# Altium PCB WMR_V3_PCB.PcbDoc
Units mm, origin at the board's own origin, x right, y up, seen from the top; angles counter-clockwise.
Board outline 170 x 170 mm, 2 copper layers (Top Layer, Bottom Layer); 22 components, 33 nets, 167 pads, 10 vias.
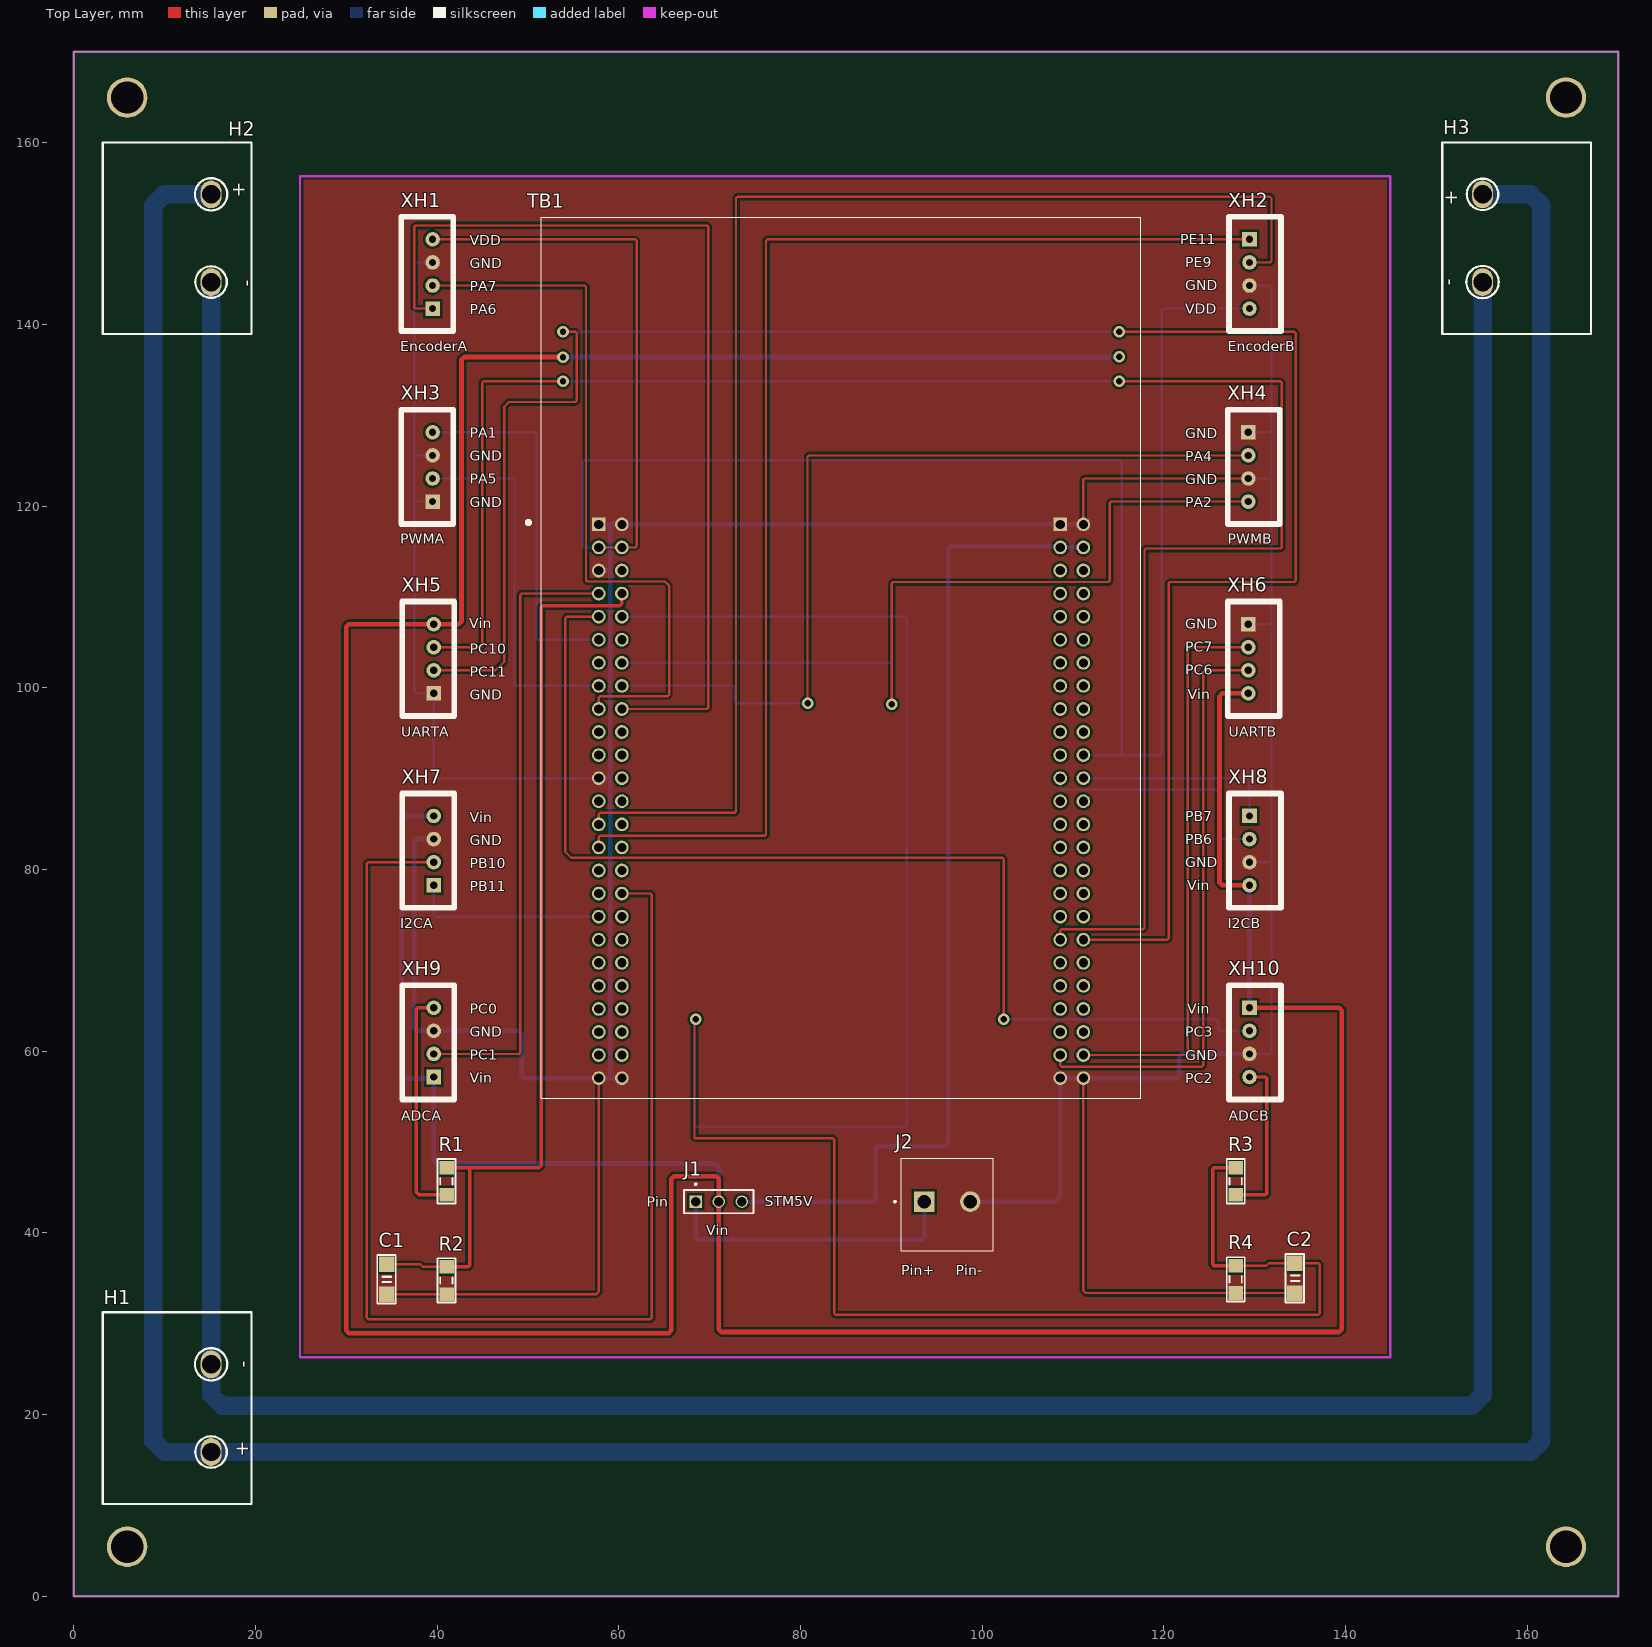
[diagram p0: Top Layer view]
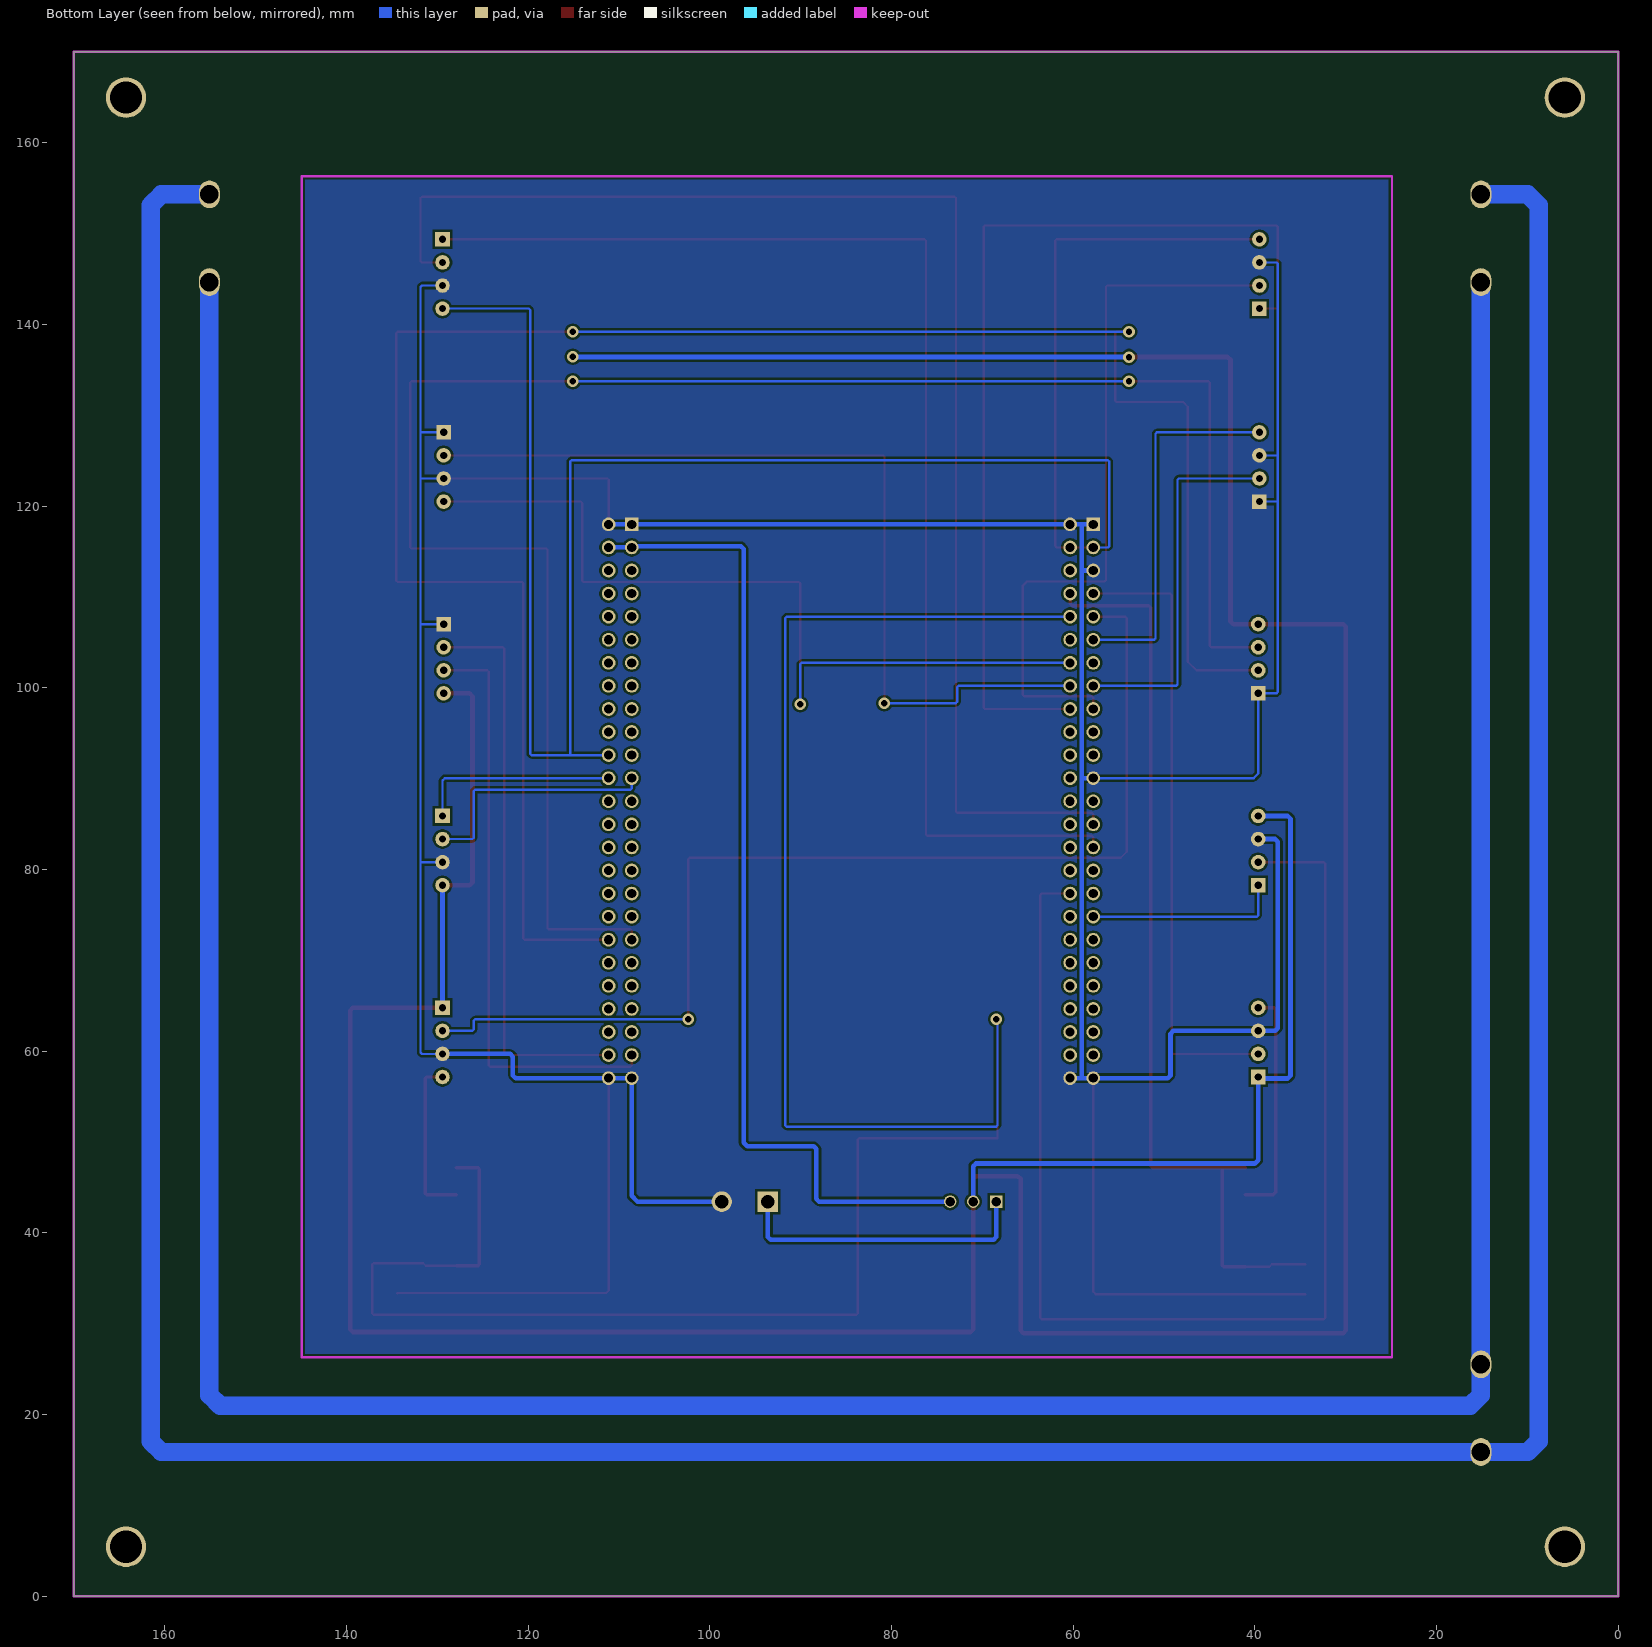
[diagram p1: Bottom Layer view, seen from below]
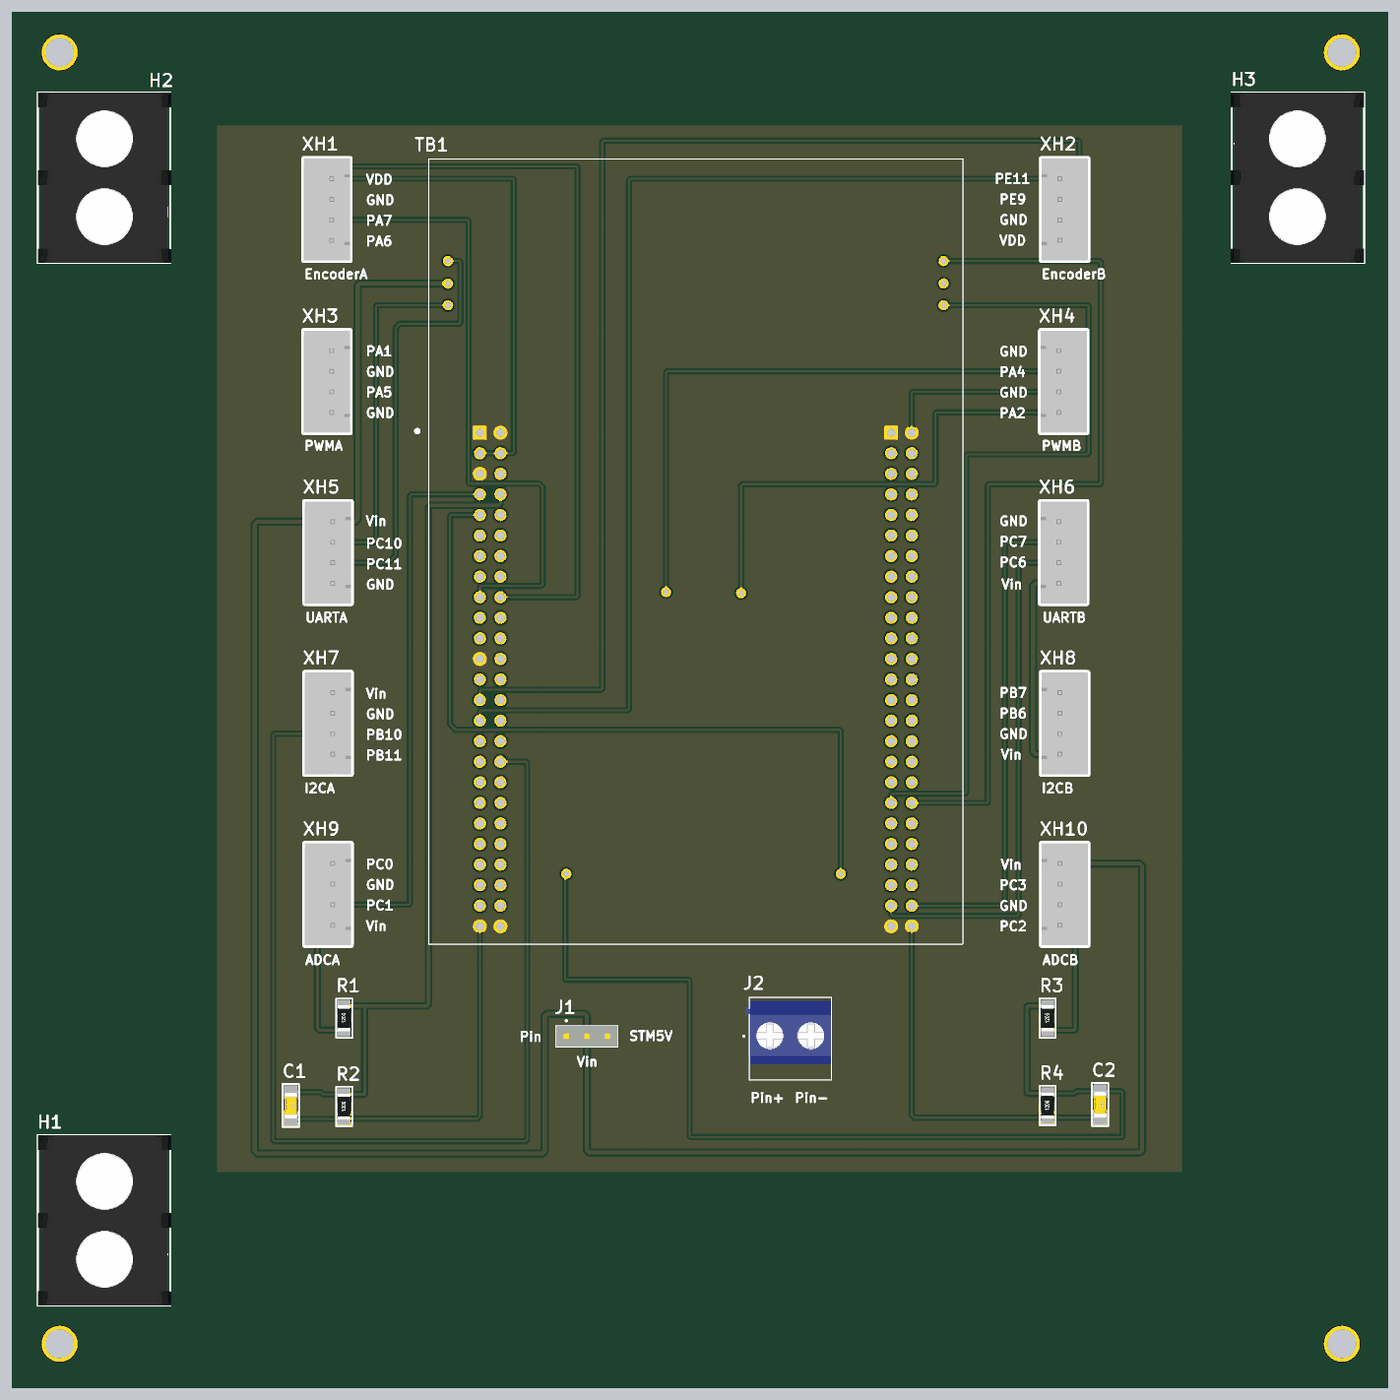
[diagram p2: 3D render of the assembled board from above, using the file's embedded part models]

## Layer stack, top to bottom
Top Solder: solder mask 0.0102, Solder Resist, Dk 3.5
Top Layer: signal copper 0.0356
Dielectric 1: dielectric 0.32, FR-4, Dk 4.8
Bottom Layer: signal copper 0.0356
Bottom Solder: solder mask 0.0102, Solder Resist, Dk 3.5

## Board outline
0,0 0,170 170,170 170,0

## Design rules (kind name [scope] priority, off if disabled: settings)
Clearance [All] p1: gap=0.254 ignorepadtopadclearanceinfootprint=FALSE except(0: Arc-Hole Track-Hole SMDPad-Hole THPad-Hole Via-Hole Fill-Hole Poly-Hole Region-Hole Text-Hole)
PolygonConnect [All] p1: connectstyle=Direct reliefconductorwidth=0.254 reliefentries=4 polygonreliefangle="90 Angle" airgapwidth=0.254
RoutingVias [All] p1: holewidth=0.711 width=1.27 viastyle="Through Hole" minholewidth=0.711 minwidth=1.27 maxholewidth=0.711 maxwidth=1.27
SolderMaskExpansion [All] p1: expansion=0.102 istentingtop=FALSE
Width [All] p1: maxlimit=2.032 minlimit=0.254 preferedwidth=0.508
30 further rules are at their usual default settings.

## Classes and differential pairs
component class WMR_V3_Sheet: R3 R4 XH1 XH2 XH3 XH4 XH5 XH6 XH7 XH8 XH9 XH10

## Components (designator, comment, footprint, x,y, rotation, side; value= is the part's Value field where it differs from the comment)
C1 "100nF" "Cap 1206" 34.425,34.879 r270 top
C2 "100nF" "Cap 1206" 134.385,35.006 r270 top
H1 "24V Vin" barrier_terminal 15.113,20.701 r90 top
H2 "H-Bridge 1" barrier_terminal 15.113,149.479 r90 top
H3 "H-Bridge 2" barrier_terminal 155.067,149.479 r270 top
J1 "" SAMTEC_TSW-101-07-G-T-LL 68.453,43.434 r270 top
J2 "" MULTICOMP_MC000048 96.139,43.434 r0 top
R1 "470" "tro smd 1206" 41.029,45.675 r90 top
R2 "1k" "tro smd 1206" 41.029,34.753 r90 top
R3 "470" "tro smd 1206" 127.908,45.674 r90 top
R4 "1k" "tro smd 1206" 127.908,34.879 r90 top
TB1 "STM32F4DISCOVERY" MODULE_STM32F4DISCOVERY 84.455,103.303 r0 top
XH1 "EncoderA" XH2.54M-4 39.497,141.732 r90 top
XH2 "EncoderB" XH2.54M-4 129.413,149.352 r270 top
XH3 "PWMA" XH2.54M-4 39.497,120.491 r90 top
XH4 "PWMB" XH2.54M-4 129.286,128.111 r270 top
XH5 "UART1" XH2.54M-4 39.624,99.377 r90 top
XH6 "UART2" XH2.54M-4 129.286,106.998 r270 top
XH7 "I2C1" XH2.54M-4 39.624,78.264 r90 top
XH8 "I2C2" XH2.54M-4 129.413,85.884 r270 top
XH9 "ADC1" XH2.54M-4 39.624,57.15 r90 top
XH10 "ADC2" XH2.54M-4 129.413,64.77 r270 top

## Footprints (in the part's own frame and the unit in brackets; to place one, negate y for a bottom-side part, rotate by r counter-clockwise, add the part's x,y. Pads: shape width x height; smd on the part's side, far side on the other; paste and mask are expansions set on the pad)
barrier_terminal [mil]
  oval 120x90 hole 80: +(-190,0) -(190,0)
  silkscreen extent -415,-175 415,470, body extent -414,-180 414,470, height 728
"Cap 1206" [mm]
  rect 1.7x1.7 smd: 1(-1.65,0) 2(1.65,0)
  silkscreen extent -2.67,-1.02 2.67,1.02, body extent -1.6,-0.8 1.6,0.8, height 1.02
MODULE_STM32F4DISCOVERY [mm]
  rect 1.508x1.508 hole 1: P1_1(-26.67,14.68) P2_1(24.13,14.68)
  round 1.508 hole 1: P1_2(-24.13,14.68) P1_3(-26.67,12.14) P1_4(-24.13,12.14) P1_5(-26.67,9.6) P1_6(-24.13,9.6) P1_7(-26.67,7.06) P1_8(-24.13,7.06) P1_9(-26.67,4.52) P1_10(-24.13,4.52) P1_11(-26.67,1.98) P1_12(-24.13,1.98) P1_13(-26.67,-0.56) P1_14(-24.13,-0.56) P1_15(-26.67,-3.1) P1_16(-24.13,-3.1) P1_17(-26.67,-5.64) P1_18(-24.13,-5.64) P1_19(-26.67,-8.18) P1_20(-24.13,-8.18) P1_21(-26.67,-10.72) P1_22(-24.13,-10.72) P1_23(-26.67,-13.26) P1_24(-24.13,-13.26) P1_25(-26.67,-15.8) P1_26(-24.13,-15.8) P1_27(-26.67,-18.34) P1_28(-24.13,-18.34) P1_29(-26.67,-20.88) P1_30(-24.13,-20.88) P1_31(-26.67,-23.42) P1_32(-24.13,-23.42) P1_33(-26.67,-25.96) P1_34(-24.13,-25.96) P1_35(-26.67,-28.5) P1_36(-24.13,-28.5) P1_37(-26.67,-31.04) P1_38(-24.13,-31.04) P1_39(-26.67,-33.58) P1_40(-24.13,-33.58) P1_41(-26.67,-36.12) P1_42(-24.13,-36.12) P1_43(-26.67,-38.66) P1_44(-24.13,-38.66) P1_45(-26.67,-41.2) P1_46(-24.13,-41.2) P1_47(-26.67,-43.74) P1_48(-24.13,-43.74) P1_49(-26.67,-46.28) P1_50(-24.13,-46.28) P2_2(26.67,14.68) P2_3(24.13,12.14) P2_4(26.67,12.14) P2_5(24.13,9.6) P2_6(26.67,9.6) P2_7(24.13,7.06) P2_8(26.67,7.06) P2_9(24.13,4.52) P2_10(26.67,4.52) P2_11(24.13,1.98) P2_12(26.67,1.98) P2_13(24.13,-0.56) P2_14(26.67,-0.56) P2_15(24.13,-3.1) P2_16(26.67,-3.1) P2_17(24.13,-5.64) P2_18(26.67,-5.64) P2_19(24.13,-8.18) P2_20(26.67,-8.18) P2_21(24.13,-10.72) P2_22(26.67,-10.72) P2_23(24.13,-13.26) P2_24(26.67,-13.26) P2_25(24.13,-15.8) P2_26(26.67,-15.8) P2_27(24.13,-18.34) P2_28(26.67,-18.34) P2_29(24.13,-20.88) P2_30(26.67,-20.88) P2_31(24.13,-23.42) P2_32(26.67,-23.42) P2_33(24.13,-25.96) P2_34(26.67,-25.96) P2_35(24.13,-28.5) P2_36(26.67,-28.5) P2_37(24.13,-31.04) P2_38(26.67,-31.04) P2_39(24.13,-33.58) P2_40(26.67,-33.58) P2_41(24.13,-36.12) P2_42(26.67,-36.12) P2_43(24.13,-38.66) P2_44(26.67,-38.66) P2_45(24.13,-41.2) P2_46(26.67,-41.2) P2_47(24.13,-43.74) P2_48(26.67,-43.74) P2_49(24.13,-46.28) P2_50(26.67,-46.28)
  silkscreen extent -34.61,-48.5 33,48.5
MULTICOMP_MC000048 [mm]
  rect 2.25x2.25 / inner round 2.25 / far side rect 2.25x2.25 hole 1.5: 1(-2.54,0)
  round 2.25 hole 1.5: 2(2.54,0)
  silkscreen extent -5.85,-5.4 5.08,4.8, body extent -5.5,-3.43 5,4.37, height 4
SAMTEC_TSW-101-07-G-T-LL [mm]
  rect 1.37x1.37 hole 1.02: 01(0,0)
  round 1.37 hole 1.02: 02(0,2.54) 03(0,5.08)
  silkscreen extent -2.02,-1.27 1.27,6.35, body extent -1.27,-1.27 1.27,6.35, height 8.38
"tro smd 1206" [mm]
  rect 1.5x1.6 smd: 1(-1.5,0) 2(1.5,0)
  silkscreen extent -2.44,-0.99 2.44,0.99, body extent -1.6,-0.8 1.6,0.8, height 0.6
XH2.54M-4 [mm]
  rect 1.6x1.6 hole 0.8: 1(0,0)
  round 1.6 hole 0.8: 2(2.54,0) 3(5.08,0) 4(7.62,0)
  silkscreen extent -2.48,-2.26 10.1,3.46, body extent -2.48,-2.26 10.1,3.48, height 6.91

## Part data
C1 C2: library part "Cap 1206", "Capacitor SMD 1206"
H1 H2 H3: library part "Barrier Terminal"
J1: library part TSW-101-07-G-T-LL, Package=None, Availability=Unavailable, MP=TSW-101-07-G-T-LL, Price=None
J2: library part MC000048, "TERMINAL BLOCK, PCB, 2WAY, 26-12AWG; Connector Type: PCB Terminal Block; Connector Mounting: PCB; Pitch Spacing: 5.08...", Package=None, Check_prices=https://www.snapeda.com/parts/MC000048/Multicomp/view-part/?ref=eda, MF=Multicomp, MP=MC000048, SnapEDA_Link=https://www.snapeda.com/parts/MC000048/Multicomp/view-part/?ref=snap
R1 R2 R3 R4: library part "Tro 1206 1% 470k", "Dán", Chung_Loai=Dán, Don_Vi=Con, Ma_Hang=MH005899, So_Chan=2, Ten_Linh_Kien="Trở 1206 5% 470k"
TB1: "Development kit: ARM ST; pin strips, pin header; No.of", Package=None, Availability=Unavailable, MP=STM32F4DISCOVERY, Price=None
XH1 XH2 XH3 XH4 XH5 XH6 XH7 XH8 XH9 XH10: library part "Header 4P 2.54 Duc Thang", "Cắm", Chung_Loai=Cắm, Don_Vi=Con, Ma_Hang=MH001285, Ten_Linh_Kien="Header 4P XH2.54-4P Đực Thẳng"

## Free pads (board coordinates)
  round 4.445 hole 3.556: 3(5.88,5.447) 3(5.88,164.959) 3(164.249,5.447) 3(164.249,164.959)

## Via types
v1: diameter 1.27, hole 0.711, Top Layer to Bottom Layer, 10 vias

## Nets (pads, with @x,y where several pads share a name; then routed paths per layer and width w, separated by ;. In a path a pad name is that pad's centre, name@x,y a point inside that pad or via, vN(x,y) a via of type N, cw(c..) or ccw(c..) an arc to the next point about the centre after c; other vN are vias at no path point)
3V3: 
5V: J1.03 TB1.P2_3 TB1.P2_4 | length 109
  Bottom Layer w0.508: J1.03 87.967,43.434 88.265,43.732 88.265,49.232 88.563,49.53 95.885,49.53 96.266,49.911 96.266,115.272 96.564,115.57 108.458,115.57 TB1.P2_3 TB1.P2_4
Do1: TB1.P1_7 XH9.2 | length 68.7
  Top Layer w0.254: XH9.2 49,59.69 49.149,59.839 49.149,110.214 49.298,110.363 TB1.P1_7
Do2: TB1.P1_9 XH10.2 | length 123.9
  Top Layer w0.254: TB1.P1_9 54.251,107.823 54.102,107.674 54.102,81.937 54.751,81.288 102.213,81.288 102.362,81.139 v1(102.362,63.5)
  Bottom Layer w0.254: v1(102.362,63.5) 125.835,63.5 125.984,63.351 125.984,62.379 126.133,62.23 XH10.2
EncA1: TB1.P1_17 XH1.2 | length 79.8
  Top Layer w0.254: XH1.2 56.239,144.272 56.388,144.123 56.388,111.845 56.537,111.697 65.087,111.697 65.532,111.252 65.532,99.209 65.383,99.06 57.934,99.06 57.785,98.911 TB1.P1_17
EncA2: TB1.P1_18 XH1.1 | length 106
  Top Layer w0.254: XH1.1 37.614,141.732 37.465,141.881 37.465,150.727 37.614,150.876 69.701,150.876 69.85,150.727 69.85,97.812 69.701,97.663 TB1.P1_18
EncB1: TB1.P1_27 XH2.2 | length 152.3
  Top Layer w0.254: TB1.P1_27 57.785,86.084 57.934,86.233 72.749,86.233 72.898,86.382 72.898,153.902 73.047,154.051 131.677,154.051 131.826,153.902 131.826,146.961 131.677,146.812 XH2.2
EncB2: TB1.P1_29 XH2.1 | length 138.3
  Top Layer w0.254: TB1.P1_29 57.785,83.544 57.934,83.693 76.051,83.693 76.2,83.842 76.2,149.203 76.349,149.352 XH2.1
GND: C1.2 C2.2 J2.2 R2.1 R4.1 TB1.P1_1 TB1.P1_2 TB1.P1_5 TB1.P1_23 TB1.P1_49 TB1.P1_50 TB1.P2_1 TB1.P2_2 TB1.P2_49 TB1.P2_50 XH1.3 XH2.3 XH3.1 XH3.3 XH4.1 XH4.3 XH5.1 XH6.1 XH7.3 XH8.3 XH9.3 XH10.3 | length 512.7
  Top Layer w0.254: C1.2 41.005,33.229 R2.1 57.51,33.253 57.785,33.528 TB1.P1_49 ; TB1.P2_50 111.125,33.655 111.401,33.379 R4.1 134.362,33.379 C2.2 ; TB1.P2_2 111.125,122.882 111.274,123.031 XH4.3
  Top Layer w0.508: TB1.P1_23 TB1.P1_23@57.941,90.199
  Bottom Layer w0.254: XH3.1 37.497,120.491 37.465,120.523 ; XH3.3 37.497,125.571 37.465,125.603 ; XH1.3 37.614,146.812 37.465,146.663 37.465,125.603 ; TB1.P1_23 40.132,90.043 39.624,90.551 XH5.1 37.614,99.377 37.465,99.526 37.465,120.523 ; XH6.1 131.762,106.998 131.826,107.061 ; XH4.3 131.794,123.031 131.826,123.063 ; XH4.1 131.794,128.111 131.826,128.143 ; XH10.3 131.677,59.69 131.826,59.839 131.826,80.772 ; XH8.3 131.794,80.804 131.826,80.772 ; XH2.3 131.677,144.272 131.826,144.123 131.826,128.143 ; 37.465,120.523 37.465,125.603 ; 131.826,80.772 131.826,107.061 ; 131.826,107.061 131.826,123.063 ; 131.826,123.063 131.826,128.143
  Bottom Layer w0.508: XH7.3 37.763,83.344 37.465,83.046 37.465,62.528 37.763,62.23 XH9.3 48.978,62.23 49.276,61.932 49.276,57.321 49.574,57.023 TB1.P1_49 59.055,57.023 ; TB1.P1_23 59.055,90.043 ; TB1.P1_5 59.055,112.903 ; TB1.P1_1 59.055,117.983 ; 59.055,89.916 59.055,57.023 ; 59.055,90.072 59.055,112.903 ; TB1.P1_50 59.055,57.023 ; J2.2 107.95,43.434 108.585,44.069 TB1.P2_49 TB1.P2_50 121.368,57.023 121.666,57.321 121.666,59.392 121.964,59.69 XH10.3 ; TB1.P2_2 TB1.P2_1 TB1.P1_2 59.055,117.983 ; 59.055,112.903 59.055,117.983
NetH1_+: H1.+ H2.- H3.+ | length 440.2
  Top Layer w2.032: H3.+@154.95,153.875 155.067,153.993 H3.+
  Bottom Layer w2.032: H2.- 9.953,154.305 8.763,153.115 8.763,17.065 9.953,15.875 H1.+ 160.354,15.875 161.544,17.065 161.544,153.115 160.354,154.305 H3.+
NetH1_-: H1.- H2.+ H3.- | length 386
  Bottom Layer w2.032: H2.+ 15.113,22.145 16.303,20.955 153.877,20.955 155.067,22.145 H3.-
NetH11_+: 
NetH11_-: 
PIN: J1.01 J2.1 | length 33.2
  Bottom Layer w0.508: J1.01 68.453,39.541 68.751,39.243 93.301,39.243 93.599,39.541 J2.1
PWMA1: TB1.P1_11 XH3.4 | length 40.9
  Bottom Layer w0.254: XH3.4 50.778,128.111 50.927,127.962 50.927,105.432 51.076,105.283 TB1.P1_11
PWMA2: TB1.P1_15 XH3.2 | length 40.9
  Bottom Layer w0.254: XH3.2 48.365,123.031 48.514,122.882 48.514,100.352 48.663,100.203 TB1.P1_15
PWMB1: TB1.P1_16 XH4.2 | length 97.9
  Top Layer w0.254: v1(80.772,98.298) 80.772,125.422 80.921,125.571 XH4.2
  Bottom Layer w0.254: TB1.P1_16 72.622,100.203 72.771,100.054 72.771,98.447 72.92,98.298 v1(80.772,98.298)
PWMB2: TB1.P1_14 XH4.4 | length 95.5
  Top Layer w0.254: v1(90.043,98.171) 90.043,111.484 90.192,111.633 113.897,111.633 114.046,111.782 114.046,120.342 114.195,120.491 XH4.4
  Bottom Layer w0.254: TB1.P1_14 89.894,102.743 90.043,102.594 v1(90.043,98.171)
RX1: TB1.P2_38 XH5.2 | length 224.1
  Top Layer w0.254: XH5.2 46.419,101.917 47.371,102.87 47.371,130.937 47.879,131.445 55.223,131.445 55.372,131.594 55.372,139.043 55.223,139.192 v1(53.848,139.192) ; TB1.P2_38 120.374,72.263 120.523,72.412 120.523,111.484 120.672,111.633 134.344,111.633 134.493,111.782 134.493,139.043 134.344,139.192 v1(115.062,139.192)
  Bottom Layer w0.254: v1(53.848,139.192) v1(115.062,139.192)
RX2: TB1.P2_48 XH6.2 | length 62.9
  Top Layer w0.254: TB1.P2_48 122.47,59.563 122.618,59.712 122.618,104.309 122.767,104.457 XH6.2
SCL1: TB1.P2_23 XH8.2 | length 27.3
  Bottom Layer w0.254: TB1.P2_23 108.585,88.922 108.734,88.773 125.835,88.773 125.984,88.624 125.984,83.493 126.133,83.344 XH8.2
SCL2: TB1.P1_34 XH7.2 | length 138.9
  Top Layer w0.254: XH7.2 32.407,80.804 32.258,80.655 32.258,30.629 32.407,30.48 63.478,30.48 63.627,30.629 63.627,77.194 63.478,77.343 TB1.P1_34
SDA1: TB1.P2_24 XH8.1 | length 22.3
  Bottom Layer w0.254: TB1.P2_24 129.159,90.043 129.413,89.789 XH8.1
SDA2: TB1.P1_35 XH7.1 | length 21.5
  Bottom Layer w0.254: XH7.1 39.624,74.952 39.773,74.803 TB1.P1_35
TX1: TB1.P2_37 XH5.3 | length 207.9
  Top Layer w0.254: XH5.3 44.809,104.457 44.958,104.606 44.958,133.582 45.107,133.731 v1(53.848,133.731) ; TB1.P2_37 108.585,73.257 108.734,73.406 117.707,73.406 117.856,73.555 117.856,115.167 118.005,115.316 132.82,115.316 132.969,115.465 132.969,133.582 132.82,133.731 v1(115.062,133.731)
  Bottom Layer w0.254: v1(53.848,133.731) v1(115.062,133.731)
TX2: TB1.P2_47 XH6.3 | length 65.3
  Top Layer w0.254: TB1.P2_47 108.585,58.442 108.734,58.293 124.184,58.293 124.333,58.442 124.333,101.769 124.482,101.917 XH6.3
VDD: TB1.P1_3 TB1.P1_4 TB1.P2_22 XH1.4 XH2.4 | length 230.6
  Top Layer w0.254: XH1.4 61.827,149.352 61.976,149.203 61.976,115.592 61.827,115.443 TB1.P1_4 TB1.P1_3
  Bottom Layer w0.254: TB1.P1_3 56.156,115.443 56.007,115.592 56.007,124.894 56.156,125.042 115.22,125.042 115.369,124.894 115.369,92.583 ; TB1.P2_22 115.369,92.583 ; XH2.4 119.91,141.732 119.761,141.583 119.761,92.732 119.612,92.583 115.369,92.583
Vin: J1.02 XH5.4 XH6.4 XH7.4 XH8.4 XH9.1 XH10.1 | length 501.8
  Top Layer w0.508: v1(53.848,136.398) 42.97,136.398 42.672,136.1 42.672,107.295 42.374,106.998 XH5.4 30.27,106.998 29.972,106.7 29.972,29.254 30.27,28.956 65.488,28.956 65.786,29.254 65.786,45.93 66.084,46.228 70.695,46.228 70.993,45.93 J1.02 70.993,29.381 71.291,29.083 139.275,29.083 139.573,29.381 139.573,64.472 139.275,64.77 XH10.1 ; XH6.4 126.409,99.377 126.111,99.08 126.111,78.561 126.409,78.264 XH8.4
  Bottom Layer w0.508: XH7.4 36.366,85.884 36.068,85.586 36.068,57.289 36.366,56.991 39.465,56.991 XH9.1 39.624,48.006 40.005,47.625 70.695,47.625 70.993,47.327 J1.02 ; v1(53.848,136.398) 53.859,136.409 115.054,136.409 v1(115.065,136.42) ; XH10.1 XH8.4
Vo1: C1.1 R1.2 R2.2 TB1.P1_8 | length 102.2
  Top Layer w0.254: C1.1 38.147,36.529 38.423,36.253 R2.2
  Top Layer w0.381: R2.2 43.412,36.253 43.561,36.402 43.561,47.175 ; R1.2 43.561,47.175 ; TB1.P1_8 60.325,109.245 60.102,109.022 51.658,109.022 51.435,108.798 51.435,47.398 51.212,47.175 43.561,47.175
Vo1_t: R1.1 XH9.4 | length 25.6
  Top Layer w0.381: XH9.4 37.868,64.77 37.719,64.621 37.719,44.45 37.994,44.175 R1.1
Vo2: C2.1 R3.2 R4.2 TB1.P1_10 | length 254.3
  Top Layer w0.254: v1(68.453,63.5) 68.324,63.371 68.324,50.419 83.544,50.419 83.693,50.27 83.693,31.137 83.842,30.988 137.011,30.988 137.16,31.137 137.16,36.507 137.011,36.656 C2.1 131.525,36.656 131.248,36.379 R4.2
  Top Layer w0.381: R4.2 125.498,36.379 125.349,36.528 125.349,47.025 125.498,47.174 R3.2
  Bottom Layer w0.254: TB1.P1_10 91.545,107.823 91.694,107.674 91.694,51.838 91.545,51.689 68.475,51.689 68.326,51.838 68.326,63.373 v1(68.453,63.5)
Vo2_t: R3.1 XH10.4 | length 18.1
  Top Layer w0.381: R3.1 131.169,44.174 131.318,44.323 131.318,57.001 131.169,57.15 XH10.4
VSS: 
pads on no net: TB1.P1_6 TB1.P1_12 TB1.P1_13 TB1.P1_19 TB1.P1_20 TB1.P1_21 TB1.P1_22 TB1.P1_24 TB1.P1_25 TB1.P1_26 TB1.P1_28 TB1.P1_30 TB1.P1_31 TB1.P1_32 TB1.P1_33 TB1.P1_36 TB1.P1_37 TB1.P1_38 TB1.P1_39 TB1.P1_40 TB1.P1_41 TB1.P1_42 TB1.P1_43 TB1.P1_44 TB1.P1_45 TB1.P1_46 TB1.P1_47 TB1.P1_48 TB1.P2_5 TB1.P2_6 TB1.P2_7 TB1.P2_8 TB1.P2_9 TB1.P2_10 TB1.P2_11 TB1.P2_12 TB1.P2_13 TB1.P2_14 TB1.P2_15 TB1.P2_16 TB1.P2_17 TB1.P2_18 TB1.P2_19 TB1.P2_20 TB1.P2_21 TB1.P2_25 TB1.P2_26 TB1.P2_27 TB1.P2_28 TB1.P2_29 TB1.P2_30 TB1.P2_31 TB1.P2_32 TB1.P2_33 TB1.P2_34 TB1.P2_35 TB1.P2_36 TB1.P2_39 TB1.P2_40 TB1.P2_41 TB1.P2_42 TB1.P2_43 TB1.P2_44 TB1.P2_45 TB1.P2_46

## Polygon pours and split planes (outlines as drawn)
GND on Bottom Layer "GND_L02_P000" (solid, pour order 0): 24.903,156.286 24.905,156.288 144.906,156.288 144.906,26.29 144.907,26.289 24.907,26.289
GND on Top Layer "GND_L01_P002" (solid, pour order 2): 24.907,156.289 24.907,26.288 144.908,26.288 144.908,26.289 144.906,26.29 144.906,156.289

## Keep-outs
Keep-Out Layer:
  lines w0.254: 0,0 170,0 170,170 0,170 0,0 ; 24.907,26.289 144.907,26.289 144.907,156.289 24.907,156.289 24.907,26.289

## Silkscreen, mask and mechanical layers (free items; w line width, h text height)
Top Overlay:
  text "PE11" at 121.781,148.808 h1.14
  text "VDD" at 43.561,148.717 h1.14
  text "PE9" at 122.353,146.268 h1.14
  text "GND" at 43.561,146.177 h1.14
  text "GND" at 122.353,143.728 h1.14
  text "PA7" at 43.561,143.637 h1.14
  text "VDD" at 122.353,141.188 h1.14
  text "PA6" at 43.561,141.097 h1.14
  text "EncoderA" at 35.941,137.033 h1.14
  text "EncoderB" at 127,137.033 h1.14
  text "PA1" at 43.561,127.508 h1.14
  text "GND" at 122.353,127.472 h1.14
  text "GND" at 43.561,124.968 h1.14
  text "PA4" at 122.353,124.932 h1.14
  text "PA5" at 43.561,122.428 h1.14
  text "GND" at 122.353,122.392 h1.14
  text "GND" at 43.561,119.888 h1.14
  text "PA2" at 122.353,119.852 h1.14
  text "PWMA" at 35.941,115.824 h1.14
  text "PWMB" at 127,115.824 h1.14
  text "Vin" at 43.529,106.54 h1.14
  text "GND" at 122.353,106.517 h1.14
  text "PC7" at 122.353,103.977 h1.14
  text "PC10" at 43.561,103.759 h1.14
  text "PC6" at 122.353,101.437 h1.14
  text "PC11" at 43.561,101.219 h1.14
  text "Vin" at 122.608,98.715 h1.14
  text "GND" at 43.561,98.679 h1.14
  text "UARTA" at 36.068,94.615 h1.14
  text "UARTB" at 127.127,94.615 h1.14
  text "PB7" at 122.353,85.308 h1.14
  text "Vin" at 43.561,85.217 h1.14
  text "PB6" at 122.353,82.768 h1.14
  text "GND" at 43.561,82.677 h1.14
  text "GND" at 122.353,80.228 h1.14
  text "PB10" at 43.561,80.137 h1.14
  text "Vin" at 122.543,77.688 h1.14
  text "PB11" at 43.561,77.597 h1.14
  text "I2CA" at 35.941,73.533 h1.14
  text "I2CB" at 127,73.533 h1.14
  text "PC0" at 43.561,64.135 h1.14
  text "Vin" at 122.543,64.099 h1.14
  text "GND" at 43.561,61.595 h1.14
  text "PC3" at 122.353,61.559 h1.14
  text "PC1" at 43.561,59.055 h1.14
  text "GND" at 122.353,59.019 h1.14
  text "Vin" at 43.561,56.515 h1.14
  text "PC2" at 122.353,56.479 h1.14
  text "ADCA" at 36.068,52.324 h1.14
  text "ADCB" at 127.127,52.324 h1.14
  text "STM5V" at 76.073,42.926 h1.14
  text "Pin" at 63.086,42.85 h1.14
  text "Vin" at 69.596,39.751 h1.14
  text "Pin+" at 91.059,35.306 h1.14
  text "Pin-" at 97.093,35.306 h1.14

## Text inside footprints (layer, text, board x,y; h text height)
H1: Top Overlay "+" at 19.177,15.367 h1.52 r90; Top Overlay "-" at 19.304,25.146 h1.52 r90
H2: Top Overlay "+" at 18.796,153.924 h1.52 r90; Top Overlay "-" at 19.685,144.145 h1.52 r90
H3: Top Overlay "+" at 151.003,154.813 h1.52 r270; Top Overlay "-" at 150.876,145.034 h1.52 r270